# Altium PCB 100068622-001_Rev1.PcbDoc (part 2 of 2)
Units mm, origin at the board's own origin, x right, y up, seen from the top; angles counter-clockwise.
Board outline 61.34 x 21.34 mm, 4 copper layers (F.Cu, In1.Cu, In2.Cu, B.Cu); 96 components, 54 nets, 231 pads, 172 vias.
Unrouted connection lines stored in the file: 5.
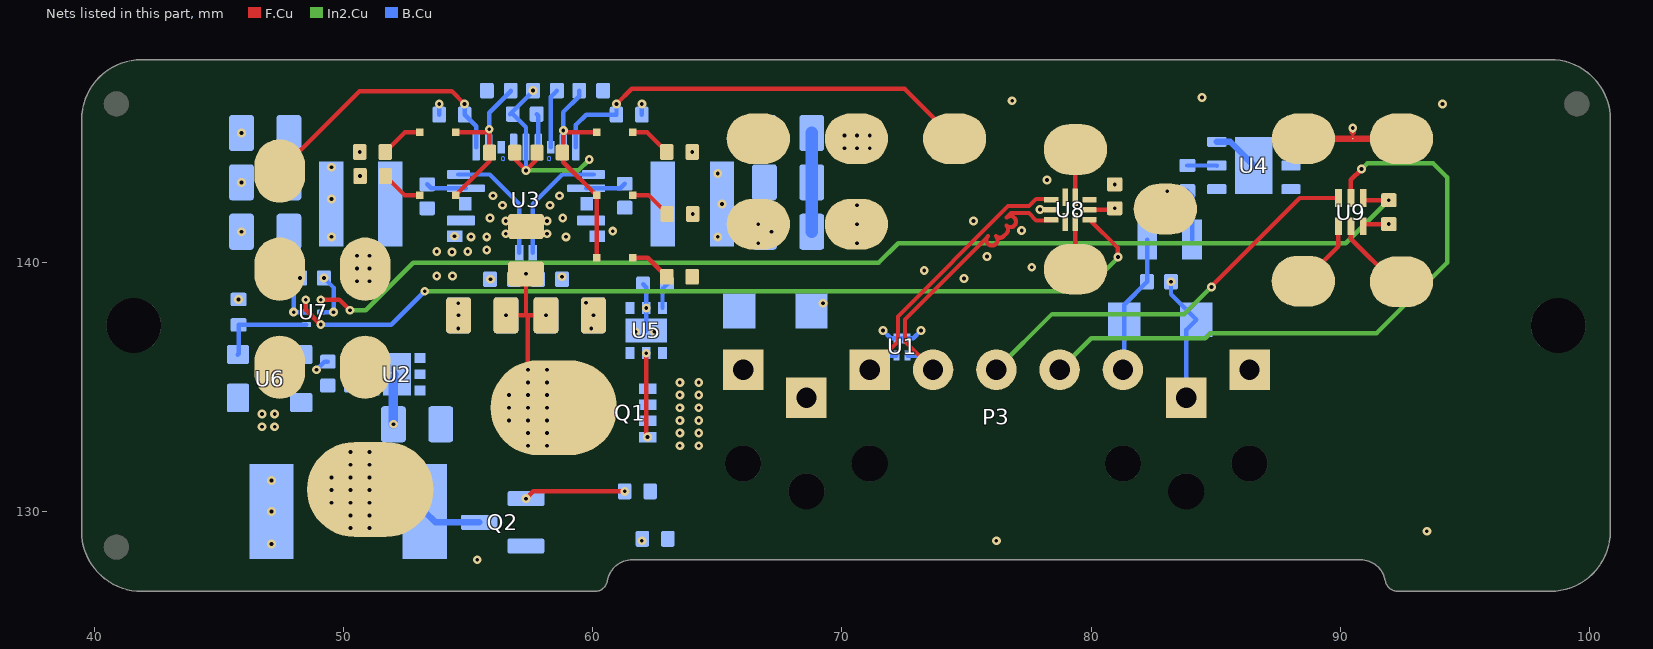
[diagram p4: the nets of this part, all layers, seen from the top]

## Part data
C1 C6: library part C_0805_2012Metric, "Capacitor SMD 0805 (2012 Metric), square (rectangular) end terminal, IPC_7351 nominal, (Body size source: IPC-SM-782 page 76, https://www.pcb-3d.com/wordpress/wp-content/uploads/ipc-sm-782a_amendment_1_and_2.pdf, https://docs.google.com/spreadsheets/d/1BsfQQcO9C6DZCsRaXUlFlo91Tg2WpOkGARC1WS5S8t0/edit?usp=sharing), generated with kicad-footprint-generator", Manufacturer="Murata Electronics", MPN=GRM21BZ71H475KE15L, Footprint=Capacitor_SMD:C_0805_2012Metric, Datasheet=https://search.murata.co.jp/Ceramy/image/img/A01X/G101/ENG/GRM21BZ71H475KE15-01.pdf, Description="CAP CER 4.7UF 50V X7R 0805", ki_fp_filters=C_*
C2: library part C_0402_1005Metric, "Capacitor SMD 0402 (1005 Metric), square (rectangular) end terminal, IPC_7351 nominal, (Body size source: IPC-SM-782 page 76, https://www.pcb-3d.com/wordpress/wp-content/uploads/ipc-sm-782a_amendment_1_and_2.pdf), generated with kicad-footprint-generator", MPN=GRM155R6YA225KE11D, Manufacturer="Murata Electronics", Footprint=Capacitor_SMD:C_0402_1005Metric, Datasheet=https://search.murata.co.jp/Ceramy/image/img/A01X/G101/ENG/GRM155R6YA225KE11-01.pdf, Description="CAP CER 2.2UF 35V X5R 0402"
C3: library part C_0805_2012Metric, "Capacitor SMD 0805 (2012 Metric), square (rectangular) end terminal, IPC_7351 nominal, (Body size source: IPC-SM-782 page 76, https://www.pcb-3d.com/wordpress/wp-content/uploads/ipc-sm-782a_amendment_1_and_2.pdf, https://docs.google.com/spreadsheets/d/1BsfQQcO9C6DZCsRaXUlFlo91Tg2WpOkGARC1WS5S8t0/edit?usp=sharing), generated with kicad-footprint-generator", MPN=GRM21BR61H106KE43L, Manufacturer="Murata Electronics", Footprint=Capacitor_SMD:C_0805_2012Metric, Datasheet=https://search.murata.co.jp/Ceramy/image/img/A01X/G101/ENG/GRM21BR61H106KE43-01A.pdf, Description="CAP CER 10UF 50V X5R 0805", ki_fp_filters=C_*
C4 C7 C10 C11 C21 C22 C23 C24: library part C_0402_1005Metric, "Capacitor SMD 0402 (1005 Metric), square (rectangular) end terminal, IPC_7351 nominal, (Body size source: IPC-SM-782 page 76, https://www.pcb-3d.com/wordpress/wp-content/uploads/ipc-sm-782a_amendment_1_and_2.pdf), generated with kicad-footprint-generator", Manufacturer="Murata Electronics", MPN=GCM155R71H104ME02D, Footprint=Capacitor_SMD:C_0402_1005Metric, Datasheet=https://search.murata.co.jp/Ceramy/image/img/A01X/G101/ENG/GCM155R71H104ME02-01.pdf, Description="CAP CER 0.1UF 50V X7R 0402", ki_fp_filters=C_*
C5 C9: library part C_0402_1005Metric, "Capacitor SMD 0402 (1005 Metric), square (rectangular) end terminal, IPC_7351 nominal, (Body size source: IPC-SM-782 page 76, https://www.pcb-3d.com/wordpress/wp-content/uploads/ipc-sm-782a_amendment_1_and_2.pdf), generated with kicad-footprint-generator", Manufacturer="Murata Electronics", MPN=GRM155R60J106ME05D, Footprint=Capacitor_SMD:C_0402_1005Metric, Datasheet=https://search.murata.co.jp/Ceramy/image/img/A01X/G101/ENG/GRM155R60J106ME05-01A.pdf, Description="CAP CER 10UF 6.3V X5R 0402", ki_fp_filters=C_*
C8: library part C_0402_1005Metric, "Capacitor SMD 0402 (1005 Metric), square (rectangular) end terminal, IPC_7351 nominal, (Body size source: IPC-SM-782 page 76, https://www.pcb-3d.com/wordpress/wp-content/uploads/ipc-sm-782a_amendment_1_and_2.pdf), generated with kicad-footprint-generator", Manufacturer="Murata Electronics", MPN=GCM155R71H103KA55D, Footprint=Capacitor_SMD:C_0402_1005Metric, Datasheet=https://search.murata.co.jp/Ceramy/image/img/A01X/G101/ENG/GCM155R71H103KA55-01.pdf, Description="CAP CER 10000PF 50V X7R 0402"
C12 C13: library part C_0402_1005Metric, "Capacitor SMD 0402 (1005 Metric), square (rectangular) end terminal, IPC_7351 nominal, (Body size source: IPC-SM-782 page 76, https://www.pcb-3d.com/wordpress/wp-content/uploads/ipc-sm-782a_amendment_1_and_2.pdf), generated with kicad-footprint-generator", Manufacturer="Murata Electronics", MPN=GCM1555C1H100FA16D, Footprint=Capacitor_SMD:C_0402_1005Metric, Datasheet=https://search.murata.co.jp/Ceramy/image/img/A01X/G101/ENG/GCM1555C1H100FA16-01.pdf, Description="CAP CER 10PF 50V C0G/NP0 0402", ki_fp_filters=C_*
C14 C15 C16 C17 C18 C19: library part C_0805_2012Metric, "Capacitor SMD 0805 (2012 Metric), square (rectangular) end terminal, IPC_7351 nominal, (Body size source: IPC-SM-782 page 76, https://www.pcb-3d.com/wordpress/wp-content/uploads/ipc-sm-782a_amendment_1_and_2.pdf, https://docs.google.com/spreadsheets/d/1BsfQQcO9C6DZCsRaXUlFlo91Tg2WpOkGARC1WS5S8t0/edit?usp=sharing), generated with kicad-footprint-generator", Manufacturer="Murata Electronics", MPN=GRM21BR61E226ME44L, Footprint=Capacitor_SMD:C_0805_2012Metric, Datasheet=https://search.murata.co.jp/Ceramy/image/img/A01X/G101/ENG/GRM21BR61H106KE43-01A.pdf, Description="CAP CER 22UF 25V X5R 0805", ki_fp_filters=C_*
C20: library part C_0402_1005Metric, "Capacitor SMD 0402 (1005 Metric), square (rectangular) end terminal, IPC_7351 nominal, (Body size source: IPC-SM-782 page 76, https://www.pcb-3d.com/wordpress/wp-content/uploads/ipc-sm-782a_amendment_1_and_2.pdf), generated with kicad-footprint-generator", MPN=GCM155R71H472KA37J, Manufacturer="Murata Electronics", Footprint=Capacitor_SMD:C_0402_1005Metric, Datasheet=https://search.murata.co.jp/Ceramy/image/img/A01X/G101/ENG/GCM155R71H472KA37-01.pdf, Description="CAP CER 4700PF 50V X7R 0402"
C25 C26 C27: library part C_0805_2012Metric, "Capacitor SMD 0805 (2012 Metric), square (rectangular) end terminal, IPC_7351 nominal, (Body size source: IPC-SM-782 page 76, https://www.pcb-3d.com/wordpress/wp-content/uploads/ipc-sm-782a_amendment_1_and_2.pdf, https://docs.google.com/spreadsheets/d/1BsfQQcO9C6DZCsRaXUlFlo91Tg2WpOkGARC1WS5S8t0/edit?usp=sharing), generated with kicad-footprint-generator", Manufacturer="TDK Corporation", MPN=C2012X5R1V226M125AC, Footprint=Capacitor_SMD:C_0805_2012Metric, Datasheet=https://product.tdk.com/system/files/dam/doc/product/capacitor/ceramic/mlcc/catalog/mlcc_commercial_general_en.pdf, Description="CAP CER 22UF 35V X5R 0805", ki_fp_filters=C_*
D1: library part SOD-123FL, Mfr=Littelfuse, MPN=SMF26A, Footprint=1a_Littelfuse:SOD-123FL, Datasheet=https://www.littelfuse.com/~/media/electronics/datasheets/tvs_diodes/littelfuse_tvs_diode_smf_datasheet.pdf.pdf, Description="TVS SOD123FL 26V 200W UNIDIR", Manufacturer=Littelfuse
D2: library part SOD-123FL, Mfr=Littelfuse, MPN=SMF3.3, Footprint=1a_Littelfuse:SOD-123FL, Datasheet=https://www.littelfuse.com/~/media/electronics/datasheets/tvs_diodes/littelfuse_tvs_diode_smf3_3_datasheet.pdf.pdf, Description="TVS DIODE 3.3VWM 6.8VC SOD123FL", Manufacturer=Littelfuse
FID1 FID2 FID3 FID4 FID5 FID6: library part Fiducial_Cu0.040_Mask0.060, "Circular Fiducial, 0.040 bare copper, 0.060 soldermask opening (Level A)", Footprint=1a_TestBoard_Library:Fiducial_Cu0.040_Mask0.060, ki_fp_filters=Fiducial*
JP1 JP2 JP3 JP4 JP5: library part SolderJumper-2_P1.3mm_Open_TrianglePad1.0x1.5mm, "SMD Solder Jumper, 1x1.5mm Triangular Pads, 0.3mm gap, open", Footprint=Jumper:SolderJumper-2_P1.3mm_Open_TrianglePad1.0x1.5mm, ki_fp_filters="Jumper* TestPoint*2Pads* TestPoint*Bridge*"
L1 L2: library part XEL4030-3.1mm, "Coilcraft XEL4030 inductor", Manufacturer=Coilcraft, MPN=XEL4030-471MEC, Footprint=1a_Misc:XEL4030-3.1mm, Datasheet=https://www.mouser.com/datasheet/2/597/xel4030-1223874.pdf, Description="0.47uH shielded inductor, 15.6A, 4.6mOhm DCR"
L3: library part "0806 SMD", MPN=MDF2016BSS270C, Manufacturer="TDK Corporation", Footprint="1a_Misc:0806 SMD", Datasheet=https://product.tdk.com/system/files/dam/doc/product/emc/emc/suppression-filter/catalog/suppression-filter_automotive_mdf2016_en.pdf, Description="FERRITE BEAD 27 OHM 0806 1LN"
NT1 NT2: library part "NetTie segment - 10 mils horizontal", Footprint="1a_Misc:NetTie segment - 10 mils horizontal", ki_fp_filters=Net*Tie*
P1 P5: library part 829-22-001-20-001101, "CONN SPRING PISTON 1POS R/A PCB", Manufacturer=Mill-Max, Footprint=1a_MillMax:829-22-001-20-001101, Datasheet=https://www.mouser.com/datasheet/2/273/MMMC_S_A0006083364_1-2558772.pdf, Description="Pogo pin header, 1-pin, 0.1\" pitch, right-angle, 55 mil stroke", MPN=829-22-001-20-001101
P2 P4: library part 829-22-001-20-002101, "CONN SPRING PISTON 1POS R/A PCB", Manufacturer=Mill-Max, Footprint=1a_MillMax:829-22-001-20-002101, Datasheet=https://www.mouser.com/datasheet/2/273/MMMC_S_A0006083364_1-2558772.pdf, Description="Pogo pin header, 1-pin, 0.1\" pitch, right-angle, 90 mil stroke", MPN=829-22-001-20-002101
P3: library part 829-22-005-20-001101, "CONN SPRING PISTON 5POS R/A PCB", Manufacturer=Mill-Max, Footprint=1a_MillMax:829-22-005-20-001101, Datasheet=https://www.mouser.com/datasheet/2/273/MMMC_S_A0006083364_1-2558772.pdf, Description="Pogo pin header, 9-pin, 0.1\" pitch, right-angle, 55 mil stroke", MPN=829-22-005-20-001101
P6 P7 P8 P9 P10 P11 P12 P13 P14 P15 P17 P18 P19 P20 P21 P23 P24: library part Hand_Solder_Pad_100x80_mil, Footprint=1a_Misc:Hand_Solder_Pad_100x80_mil
P16 P22: library part Hand_Solder_Pad_200x150_mil, Footprint=1a_Misc:Hand_Solder_Pad_200x150_mil
Q1: library part WDFN8_3.3_x_3.3_0.65mm_p, Manufacturer=onsemi, MPN=NTTFS2D1N04HLTWG, Footprint=1a_Misc:WDFN8_3.3_x_3.3_0.65mm_p, Datasheet=https://www.onsemi.com/pdf/datasheet/nttfs2d1n04hl-d.pdf, Description="MOSFET N-CH 40V 24A/150A 8PQFN"
Q2: library part SOT-23, "SOT, 3 Pin (https://www.jedec.org/system/files/docs/to-236h.pdf variant AB), generated with kicad-footprint-generator ipc_gullwing_generator.py", Mfr="Diodes Incorporated", MPN=DMP610DL-13, Footprint=Package_TO_SOT_SMD:SOT-23, Datasheet=https://www.diodes.com/assets/Datasheets/DMP610DL.pdf, Description="MOSFET BVDSS: 41V 60V SOT23 T&R", Manufacturer="Diodes Incorporated"
R1 R2 R13 R14: library part R_0402_1005Metric, "Resistor SMD 0402 (1005 Metric), square (rectangular) end terminal, IPC_7351 nominal, (Body size source: IPC-SM-782 page 72, https://www.pcb-3d.com/wordpress/wp-content/uploads/ipc-sm-782a_amendment_1_and_2.pdf), generated with kicad-footprint-generator", Manufacturer="Panasonic Electronic Components", MPN=ERJ-2RKF1003X, Footprint=Resistor_SMD:R_0402_1005Metric, Datasheet=https://industrial.panasonic.com/cdbs/www-data/pdf/RDA0000/AOA0000C304.pdf, Description="RES SMD 100K OHM 1% 1/10W 0402", ki_fp_filters=R_*
R3: library part R_0402_1005Metric, "Resistor SMD 0402 (1005 Metric), square (rectangular) end terminal, IPC_7351 nominal, (Body size source: IPC-SM-782 page 72, https://www.pcb-3d.com/wordpress/wp-content/uploads/ipc-sm-782a_amendment_1_and_2.pdf), generated with kicad-footprint-generator", Manufacturer="Vishay Dale", MPN=TNPW040234K4BEED, Footprint=Resistor_SMD:R_0402_1005Metric, Datasheet=https://www.vishay.com/docs/28758/tnpw_e3.pdf, Description="RES 34.4K OHM 0.1% 1/16W 0402"
R4 R7: library part R_0402_1005Metric, "Resistor SMD 0402 (1005 Metric), square (rectangular) end terminal, IPC_7351 nominal, (Body size source: IPC-SM-782 page 72, https://www.pcb-3d.com/wordpress/wp-content/uploads/ipc-sm-782a_amendment_1_and_2.pdf), generated with kicad-footprint-generator", MPN=ERJ-U02F1102X, Manufacturer="Panasonic Electronic Components", Footprint=Resistor_SMD:R_0402_1005Metric, Datasheet=https://industrial.panasonic.com/cdbs/www-data/pdf/RDP0000/AOA0000C334.pdf, Description="RES 11K OHM 1% 1/10W 0402", ki_fp_filters=R_*
R5 R6: library part R_0402_1005Metric, "Resistor SMD 0402 (1005 Metric), square (rectangular) end terminal, IPC_7351 nominal, (Body size source: IPC-SM-782 page 72, https://www.pcb-3d.com/wordpress/wp-content/uploads/ipc-sm-782a_amendment_1_and_2.pdf), generated with kicad-footprint-generator", MPN=ERJ-2RKF5762X, Manufacturer="Panasonic Electronic Components", Footprint=Resistor_SMD:R_0402_1005Metric, Datasheet=https://industrial.panasonic.com/cdbs/www-data/pdf/RDA0000/AOA0000C304.pdf, Description="RES SMD 57.6K OHM 1% 1/10W 0402", ki_fp_filters=R_*
R8: library part R_0402_1005Metric, "Resistor SMD 0402 (1005 Metric), square (rectangular) end terminal, IPC_7351 nominal, (Body size source: IPC-SM-782 page 72, https://www.pcb-3d.com/wordpress/wp-content/uploads/ipc-sm-782a_amendment_1_and_2.pdf), generated with kicad-footprint-generator", MPN=ERJ-2RKF9092X, Manufacturer="Panasonic Electronic Components", Footprint=Resistor_SMD:R_0402_1005Metric, Datasheet=https://industrial.panasonic.com/cdbs/www-data/pdf/RDA0000/AOA0000C304.pdf, Description="RES SMD 90.9K OHM 1% 1/10W 0402", ki_fp_filters=R_*
R9: library part R_0402_1005Metric, "Resistor SMD 0402 (1005 Metric), square (rectangular) end terminal, IPC_7351 nominal, (Body size source: IPC-SM-782 page 72, https://www.pcb-3d.com/wordpress/wp-content/uploads/ipc-sm-782a_amendment_1_and_2.pdf), generated with kicad-footprint-generator", MPN=ERJ-2RKF1543X, Manufacturer="Panasonic Electronic Components", Footprint=Resistor_SMD:R_0402_1005Metric, Datasheet=https://industrial.panasonic.com/cdbs/www-data/pdf/RDA0000/AOA0000C304.pdf, Description="RES SMD 154K OHM 1% 1/10W 0402", ki_fp_filters=R_*
R10 R11: library part R_0402_1005Metric, "Resistor SMD 0402 (1005 Metric), square (rectangular) end terminal, IPC_7351 nominal, (Body size source: IPC-SM-782 page 72, https://www.pcb-3d.com/wordpress/wp-content/uploads/ipc-sm-782a_amendment_1_and_2.pdf), generated with kicad-footprint-generator", MPN=ERJ-2RKF1000X, Mfr=Panasonic, Manufacturer="Panasonic Electronic Components", Footprint=Resistor_SMD:R_0402_1005Metric, Datasheet=https://industrial.panasonic.com/cdbs/www-data/pdf/RDA0000/AOA0000C304.pdf, Description="RES SMD 100 OHM 1% 1/10W 0402", ki_fp_filters=R_*
R12: library part R_2512_HandSoldering, "Resistor SMD 2512 (6332 Metric), square (rectangular) end terminal, IPC_7351 nominal with elongated pad for handsoldering. (Body size source: IPC-SM-782 page 72, https://www.pcb-3d.com/wordpress/wp-content/uploads/ipc-sm-782a_amendment_1_and_2.pdf), generated with kicad-footprint-generator", Tolerance=1%, Power=1W, MPN=RMCF2512FT1K00, Manufacturer="STACKPOLE ELECTRONICS INC.", Footprint=1a_CommonPassives:R_2512_HandSoldering, Datasheet=https://www.seielect.com/catalog/sei-rmcf_rmcp.pdf, Description="RES 1K OHM 1% 1W 2512 AEC-Q200", Stocked=Yes, VendorPN=RMCF2512FT1K00CT-ND, Vendor=Digikey, ki_fp_filters=R_*
REF1 REF2: library part MountingHole_2.2mm_M2, "Mounting Hole 2.2mm, no annular, M2", Footprint=MountingHole:MountingHole_2.2mm_M2
U1: library part Diodes_DFN1006-3, "DFN package size 1006 3 pins", MPN=PESD5V0C2UM, Mfr=Nexperia, Footprint=Package_DFN_QFN:Diodes_DFN1006-3, Datasheet=https://assets.nexperia.com/documents/data-sheet/PESD5V0C2UM.pdf, Description="TVS DIODE 5VWM 3.4VC DFN1006-3", Manufacturer=Nexperia
U2: library part WDFN6_2x2_0.65p_1.72x1.12mm_EP, Manufacturer=onsemi, MPN=NCP730BMT330TBG, Footprint=1a_Misc:WDFN6_2x2_0.65p_1.72x1.12mm_EP, Datasheet=https://www.onsemi.com/pdf/datasheet/ncp730-d.pdf, Description="IC REG LINEAR 3.3V 150MA 6WDFN"
U3: library part F234A5FY+1, Manufacturer="Analog Devices Inc./Maxim Integrated", MPN=MAX25254AFDE/VY+, Footprint=1a_Misc:F234A5FY+1, Datasheet=https://www.analog.com/media/en/technical-documentation/data-sheets/max25254-max25255.pdf, Description="Dual 36V input, 0.8-14V output, 8A synchronous buck converter"
U4: library part Maxim_TDFN-6-1EP_3x3mm_P0.95mm_EP1.5x2.3mm, "Maxim  TDFN, 6 Pin (https://www.analog.com/media/en/technical-documentation/data-sheets/MAX4460-MAX4462.pdf#page=19, https://www.analog.com/media/en/package-pcb-resources/package/pkg_pdf/tdfn-ep/21-0137.pdf), generated with kicad-footprint-generator ipc_noLead_generator.py", Manufacturer="Analog Devices Inc./Maxim Integrated", MPN=DS2431Q+T&R, Footprint=Package_DFN_QFN:Maxim_TDFN-6-1EP_3x3mm_P0.95mm_EP1.5x2.3mm, Datasheet=https://www.analog.com/media/en/technical-documentation/data-sheets/DS2431.pdf, Description="EEPROM Memory IC 1Kbit 1-Wire® 2 µs 6-TDFN (3x3)"
U5: library part WDFNW6_2x2_0.65p_EP, Manufacturer=onsemi, MPN=NCV68261MTWAITBG, Footprint=1a_Misc:WDFNW6_2x2_0.65p_EP, Datasheet=https://www.onsemi.com/pdf/datasheet/ncv68261-d.pdf, Description="Power Switch/Driver 1:1 N-Channel 6-WDFNW (2x2)"
U6: library part "SOT-143 Maxim", "SOT-143 Maxim", MPN=MAX821UUS+T, Manufacturer="Analog Devices Inc./Maxim Integrated", Footprint="1a_Misc:SOT-143 Maxim", Datasheet=https://www.analog.com/media/en/technical-documentation/data-sheets/max821-max822t.pdf, Description="IC SUPERVISOR 1 CHANNEL 2.78V S78OT143-4"
U7: library part "QFN-6_1.4x1mm_P0.5mm TI DRY6", "QFN-6_1.4x1mm_P0.5mm TI DRY6", MPN=SN74AUP3G04DQER, Manufacturer="Texas Instruments", Footprint="1a_Misc:QFN-6_1.4x1mm_P0.5mm TI DRY6", Datasheet=https://www.ti.com/lit/ds/symlink/sn74aup3g04.pdf, Description="IC INVERTER 3CH 3-INP 8X2SON", ki_fp_filters=DQE8
U8: library part "Toshiba UQFN-10_1.4x1.8mm_P0.4mm", "UQFN 10pin", MPN=TC7USB40MU, Manufacturer="Toshiba Semiconductor and Storage", Footprint="1a_Misc:Toshiba UQFN-10_1.4x1.8mm_P0.4mm", Datasheet=https://toshiba.semicon-storage.com/info/docget.jsp?did=13632&prodName=TC7USB40MU, Description="IC USB SWITCH SPDT DUAL 10UQFN"
U9: library part FC2QFN-6, "Maxim 6-pin FC2QFN 1.25mm x 1.75mm P0.5mm", MPN=MAX20336AEFT+, Manufacturer="Analog Devices Inc./Maxim Integrated", Footprint=1a_Misc:FC2QFN-6, Datasheet=https://www.analog.com/media/en/technical-documentation/data-sheets/MAX20336.pdf, Description="IC SWITCH DPSTX1 330MOHM 6WLP"

## Via types
v1: diameter 0.356, hole 0.152, F.Cu to B.Cu, tented both sides, 172 vias

## Nets (pads, with @x,y where several pads share a name; then routed paths per layer and width w, separated by ;. In a path a pad name is that pad's centre, name@x,y a point inside that pad or via, vN(x,y) a via of type N, cw(c..) or ccw(c..) an arc to the next point about the centre after c; other vN are vias at no path point)
DETECT: C20.1 D2.1 L3.1 P3.5 | length 5.6
  B.Cu w0.178: P3.5@81.28,135.687 81.329,135.735 D2.1@81.329,137.693 81.329,138.298 C20.1@82.248,139.217 82.248,140.904 L3.1@82.254,140.91
GND: C1.2 C2.2 C3.2 C4.2 C6.2 C7.2 C8.2 C9.2 C14.2 C15.2 C16.2 C17.2 C18.2 C19.2 C20.2 C21.2 C22.2 C23.2 C24.2 C25.2 C26.2 C27.2 D1.2 D2.2 NT1.2 NT2.2 P2.1 P4.1 P17.1 P18.1 P19.1 P20.1 P21.1 P22.1 R12.1 R13.2 R14.2 U1.3 U2.3 U2.7 U3.6 U3.9 U4.3 U4.7 U5.5 U5.7 U6.1 U7.2 U8.4 U8.10 U9.3 | length 24.5
  F.Cu w0.178: v1(77.953,142.113) U8.4@78.403,142.113 ; U9.3@91.013,141.531 v1(91.948,141.531)
  F.Cu w0.254: NT2.2@90.5,145.212 v1(90.5,145.39)
  B.Cu w0.178: v1(48.263,139.37) 48.006,139.113 v1(48.006,137.998) U7.2@48.493,137.998 ; v1(48.92,135.687) 49.247,136.014 C9.2@49.378,136.014 ; C8.2@50.343,136.014 50.487,136.158 U2.3@51.221,136.158 51.496,136.158 U2.7@52.146,135.508 U2.7@52.009,135.371 ; NT1.2@56.693,145.948 57.61,146.865 v1(57.61,146.888) ; C21.2@62.029,139.116 62.154,138.991 v1(62.154,138.172) U5.7@62.154,137.262 ; v1(71.653,137.262) 71.964,136.951 U1.3@72.415,136.951 72.867,136.951 v1(73.177,137.262) ; v1(83.208,139.217) 83.208,138.714 D2.2@84.229,137.693 83.82,137.285 P4.1@83.82,134.569
  B.Cu w0.254: U4.3@85.044,144.832 85.582,144.832 U4.7@86.532,143.882 U4.7@86.436,143.786
  B.Cu w0.381: v1(52.009,133.502) U2.7@52.009,135.371
  B.Cu w0.508: C19.2@68.793,141.224 C18.2@68.793,143.205 C16.2@68.793,145.186
  other v1: 55.372,128.067 47.117,128.702 61.976,128.829 76.2,128.829 93.472,129.21 50.292,129.337 51.054,129.337 50.292,129.845 51.054,129.845 47.117,129.997 49.53,130.353 50.292,130.353 51.054,130.353 49.53,130.861 50.292,130.861 51.054,130.861 47.117,131.242 49.53,131.369 50.292,131.369 51.054,131.369 50.292,131.877 51.054,131.877 50.292,132.385 51.054,132.385 61.722,137.211 62.484,137.211 54.61,137.338 59.944,137.338 54.625,137.871 60.03,137.871 54.61,138.354 69.24,138.354 59.741,138.379 45.796,138.508 55.905,139.319 74.905,139.344 58.773,139.421 53.746,139.446 54.381,139.446 73.304,139.675 77.622,139.802 75.819,140.233 54.356,140.411 53.746,140.437 54.991,140.437 55.753,140.487 55.118,141.021 55.753,141.021 58.928,141.021 54.463,141.046 56.515,141.148 58.166,141.148 45.913,141.224 60.808,141.249 77.216,141.275 56.515,141.656 58.166,141.656 75.286,141.656 55.88,141.783 58.801,141.783 56.388,142.291 58.293,142.291 56.007,142.672 58.674,142.672 83.058,142.85 80.95,143.126 45.913,143.205 78.232,143.307 70.104,144.577 70.612,144.577 71.12,144.577 70.104,145.085 70.612,145.085 71.12,145.085 45.913,145.186 94.107,146.355 76.835,146.482 84.455,146.609
GNDA: C5.2 NT1.1 R4.2 R7.2 U3.19 | length 7
  F.Cu w0.178: R7.2@56.884,144.399 56.884,144.131 v1(57.328,143.688) 57.769,144.129 R4.2@57.769,144.399
  In2.Cu w0.178: v1(57.328,143.688) 59.436,143.688 v1(59.868,144.12)
  B.Cu w0.178: C5.2@56.797,145.948 57.328,145.418 U3.19@57.328,144.621 v1(57.328,143.688)
GNDD: NT2.1 P23.1 P24.1 | length 3.9
  F.Cu w0.254: P23.1@88.519,144.958 P24.1@92.456,144.958
GPIO0: P3.4 U9.5 | length 25.8
  F.Cu w0.178: U9.5@90.424,142.58 90.424,143.307 v1(90.856,143.739)
  In2.Cu w0.178: P3.4@78.74,135.687 80.01,136.957 84.582,136.957 84.785,137.16 91.465,137.16 94.285,139.979 94.285,143.408 93.726,143.967 91.084,143.967 v1(90.856,143.739)
GPIO1: P3.3 U9.6 | length 16.6
  F.Cu w0.178: v1(84.836,139.014) 84.836,139.04 88.377,142.58 U9.6@89.924,142.58
  In2.Cu w0.178: P3.3@76.2,135.687 78.435,137.922 83.744,137.922 v1(84.836,139.014)
GPIO_DOWN_0: P15.1 U9.2 | length 3.2
  F.Cu w0.178: U9.2@90.424,141.442 90.424,140.945 92.151,139.217 P15.1@92.456,139.217
GPIO_DOWN_1: P14.1 U9.1 | length 2.8
  F.Cu w0.178: P14.1@88.519,139.243 89.924,140.648 U9.1@89.924,141.442
Net-(JP1-A): C12.2 JP1.1 JP3.1 R7.1 U3.16 | length 7.2
  F.Cu w0.178: JP3.1@54.508,142.697 55.855,144.043 v1(55.855,145.339) 55.728,145.212 JP1.1@54.508,145.212
  B.Cu w0.178: U3.16@55.828,144.621 55.855,144.648 v1(55.855,145.339) 55.855,145.999 56.716,146.86 C12.2@56.716,146.888
Net-(JP1-B): JP1.2 R3.2 | length 1.7
  F.Cu w0.178: R3.2@51.677,144.424 52.465,145.212 JP1.2@53.058,145.212
Net-(JP2-A): C13.2 JP2.1 JP4.1 JP5.1 R4.1 U3.22 | length 9.6
  F.Cu w0.178: JP5.1@60.17,140.183 JP4.1@60.17,142.697 60.147,142.697 58.826,144.018 58.826,144.362 R4.1@58.789,144.399 58.826,144.436 v1(58.826,145.288) 58.903,145.212 JP2.1@60.17,145.212
  B.Cu w0.178: U3.22@58.828,144.621 58.828,146.026 59.464,146.662 C13.2@59.464,146.888
Net-(JP2-B): JP2.2 R5.2 | length 1.7
  F.Cu w0.178: JP2.2@61.62,145.212 62.189,145.212 R5.2@62.976,144.424
Net-(JP3-B): JP3.2 R6.2 | length 1.7
  F.Cu w0.178: R6.2@51.691,143.459 52.453,142.697 JP3.2@53.058,142.697
Net-(JP4-B): JP4.2 R8.2 | length 1.7
  F.Cu w0.178: JP4.2@61.62,142.697 62.24,142.697 R8.2@63.002,141.935
Net-(JP5-B): JP5.2 R9.2 | length 1.7
  F.Cu w0.178: JP5.2@61.62,140.183 62.214,140.183 R9.2@62.976,139.421
Net-(L3-Pad2): L3.2 R10.2 | length 2
  B.Cu w0.178: R10.2@83.865,142.864 84.054,142.675 L3.2@84.054,140.91
Net-(Q1-G): Q1.4 U5.2 | length 3.4
  F.Cu w0.178: v1(62.154,136.352) 62.154,133.038 v1(62.208,132.985)
Net-(Q2-D): Q2.3 R12.2 | length 2.4
  B.Cu w0.254: R12.2@53.264,129.997 53.696,129.565 Q2.3@55.451,129.565
Net-(Q2-G): Q2.1 R11.2 | length 4.1
  F.Cu w0.178: v1(57.325,130.515) 57.62,130.81 v1(61.288,130.81)
Net-(U3-BIAS): C5.1 U3.20 | length 1.4
  B.Cu w0.178: C5.1@57.757,145.948 57.828,145.878 U3.20@57.828,144.621
Net-(U3-BST1): C10.2 U3.12 | length 1.6
  B.Cu w0.178: C10.2@53.365,143.126 53.521,142.971 U3.12@54.915,142.971
Net-(U3-BST2): C11.2 U3.3 | length 1.6
  B.Cu w0.178: U3.3@59.74,142.971 61.109,142.971 C11.2@61.29,143.152
Net-(U3-EXTVCC): C2.1 U3.21 | length 2.4
  B.Cu w0.178: U3.21@58.328,144.621 58.328,146.646 C2.1@58.57,146.888
Net-(U3-LX1): C10.1 L1.1 U3.11
Net-(U3-LX2): C11.1 L2.1 U3.4
Net-(U4-IO): R10.1 U4.2 | length 1.2
  B.Cu w0.178: R10.1@83.865,143.884 85.042,143.884 U4.2@85.044,143.882
Net-(U6-{\R\E\S\E\T\}\)\: R13.1 U6.2 U7.1 | length 3.9
  B.Cu w0.178: U6.2@45.771,136.296 45.796,136.322 R13.1@45.796,137.488 45.806,137.498 U7.1@48.518,137.498
Net-(U7-2Y): C23.1 U7.4 U9.4 | length 45.8
  F.Cu w0.178: v1(49.093,138.498) 49.843,138.498 v1(50.267,138.074) ; U9.4@91.013,142.491 v1(91.948,142.491)
  In2.Cu w0.178: v1(50.267,138.074) 50.902,138.074 52.807,139.979 71.476,139.979 72.263,140.767 90.223,140.767 v1(91.948,142.491)
P3V3_AUX: C8.1 C9.1 C22.1 C24.1 R1.2 R2.1 U2.1 U6.4 U7.5 U8.9 | length 4.9
  F.Cu w0.178: U8.9@79.94,142.113 80.896,142.113 v1(80.95,142.166)
  B.Cu w0.178: U7.5@49.093,137.998 v1(49.606,137.998) 49.606,138.986 v1(49.223,139.37) ; C8.1@50.343,135.054 51.026,135.054 U2.1@51.221,134.858 ; R2.1@53.846,145.923 53.846,146.353 v1(53.848,146.355) ; v1(61.976,146.355) 61.978,146.353 R1.2@61.978,145.923
  other v1: 46.736,133.401 47.244,133.401 46.736,133.909 47.244,133.909
PGOOD1: P6.1 R2.2 U3.15 | length 10.9
  F.Cu w0.178: P6.1@47.447,143.662 50.648,146.863 54.356,146.863 54.864,146.355 v1(54.866,146.355)
  B.Cu w0.178: v1(54.866,146.355) R2.2@54.866,145.923 55.328,145.461 U3.15@55.328,144.621
PGOOD2: P7.1 R1.1 U3.23 | length 17.8
  F.Cu w0.178: v1(60.96,146.355) 61.57,146.964 72.517,146.964 P7.1@74.524,144.958
  B.Cu w0.178: U3.23@59.328,144.621 59.328,145.51 59.741,145.923 R1.1@60.958,145.923 60.958,146.353 v1(60.96,146.355)
RESET: U7.3 U7.6 U8.8 | length 36.3
  F.Cu w0.178: v1(48.493,138.498) 48.493,138.098 v1(49.093,137.498) ; U8.8@79.94,141.712 81.077,140.575 v1(81.077,140.208)
  In2.Cu w0.178: v1(53.264,138.836) 79.731,138.836 81.077,140.183 v1(81.077,140.208)
  B.Cu w0.178: v1(49.093,137.498) 51.926,137.498 v1(53.264,138.836)
unconnected-(U2-NC-Pad2): U2.2
unconnected-(U2-PG-Pad5): U2.5
unconnected-(U3-NC-Pad5): U3.5
unconnected-(U3-NC-Pad10): U3.10
unconnected-(U3-SYNCOUT-Pad14): 
unconnected-(U3-TEMP-Pad17): U3.17
unconnected-(U3-VEA-Pad18): U3.18
unconnected-(U4-NC-Pad1): U4.1
unconnected-(U4-NC-Pad4): U4.4
unconnected-(U4-NC-Pad5): U4.5
unconnected-(U4-NC-Pad6): U4.6
unconnected-(U6-SRT-Pad3): U6.3
unconnected-(U8-2D+-Pad2): U8.2
unconnected-(U8-2D--Pad6): U8.6
USB_D+: P3.1 U1.2 U8.3 | length 12
  F.Cu w0.163: P3.1@71.12,135.687 72.252,136.818 72.252,137.827 76.676,142.251 77.507,142.251 77.8,142.545 78.371,142.545 U8.3@78.403,142.513
  B.Cu w0.178: P3.1@71.12,135.687 71.684,136.251 U1.2@72.19,136.251
USB_D-: P3.2 U1.1 U8.5 | length 13.4
  F.Cu w0.163: P3.2@73.66,135.687 72.528,136.818 72.528,137.712 75.756,140.94 75.865,141.049 ccw(c76.023,140.891) 76.181,141.049 ccw(c76.338,141.207) 76.496,141.049 76.605,141.158 ccw(c76.447,141.315) 76.605,141.473 ccw(c76.763,141.631) 76.605,141.789 76.791,141.975 77.507,141.975 77.8,141.681 78.371,141.681 U8.5@78.403,141.713
  B.Cu w0.178: U1.1@72.64,136.251 73.096,136.251 P3.2@73.66,135.687
USB_DOWN_DM: P13.1 U8.7 | length 1.9
  F.Cu w0.178: U8.7@79.372,141.62 79.372,139.729 P13.1@79.375,139.725
USB_DOWN_DP: P12.1 U8.1 | length 1.9
  F.Cu w0.178: U8.1@79.372,142.606 79.372,144.523 P12.1@79.375,144.526
VBATT: C21.1 D1.1 P1.1 P5.1 Q1.1 Q1.2 Q1.3 R11.1 R14.1 U5.1 U5.4 U5.6 | length 1
  B.Cu w0.178: U5.6@62.804,138.172 62.804,138.93 C21.1@62.989,139.116
  other v1: 63.5,132.639 64.262,132.639 63.5,133.147 64.262,133.147 63.5,133.655 64.262,133.655 63.5,134.163 64.262,134.163 63.5,134.671 64.262,134.671 63.5,135.179 64.262,135.179
VBATT_PROT: C1.1 C3.1 C4.1 C6.1 C7.1 C25.1 C26.1 C27.1 P16.1 Q1.5 Q2.2 U2.4 U2.6 U3.2 U3.7 U3.8 U3.13 U5.3 | length 15.3
  F.Cu w0.178: v1(56.525,137.871) 57.328,137.871 ; v1(57.328,139.537) 57.328,137.871 ; v1(57.404,135.687) 57.404,137.795 57.328,137.871 ; v1(58.13,137.871) 57.328,137.871
  B.Cu w0.178: U3.13@54.615,143.521 55.869,143.521 57.053,142.337 U3.8@57.053,140.383 ; U3.7@57.603,140.383 57.603,142.337 58.787,143.521 U3.2@60.04,143.521
  other v1: 57.404,132.639 58.166,132.639 57.404,133.147 58.166,133.147 56.642,133.655 57.404,133.655 58.166,133.655 56.642,134.163 57.404,134.163 58.166,134.163 56.642,134.671 57.404,134.671 58.166,134.671 57.404,135.179 58.166,135.179 58.166,135.687
VOUT1: C12.1 C14.1 C15.1 C17.1 L1.2 P10.1 P11.1 R3.1 R6.1
  other v1: 50.546,139.243 51.054,139.243 50.546,139.751 51.054,139.751 50.546,140.259 51.054,140.259 49.53,141.021 49.53,142.545 50.671,143.459 49.53,143.815 50.657,144.424
VOUT2: C13.1 C16.1 C18.1 C19.1 L2.2 P8.1 P9.1 R5.1 R8.1 R9.1
  other v1: 66.65,140.767 70.612,140.767 65.024,141.021 67.183,141.224 66.65,141.529 70.612,141.529 64.022,141.935 70.612,142.291 65.193,142.342 65.024,143.561 63.996,144.424
pads on no net: FID1.Un1 FID2.Un1 FID3.Un1 FID4.Un1 FID5.Un1 FID6.Un1 P1.Un1 P2.Un1 P3.Un1 P3.Un2 P4.Un1 P5.Un1 REF1.Un1 REF2.Un1 U4.Un1 U4.Un2 U4.Un3 U4.Un4

## Polygon pours and split planes (outlines as drawn)
VBATT on F.Cu "F.Cu-/Block Diagram/VBATT" (solid, remove dead copper, pour order 28): 62.713,128.118 88.976,128.118 88.976,138.1 62.713,138.1
GND on F.Cu "F.Cu-GND-1" (solid, remove dead copper, pour order 27): 45.466,146.101 45.72,146.609 46.228,146.863 93.726,146.863 94.488,146.609 94.742,145.847 94.742,129.591 94.234,128.575 93.218,128.067 91.948,128.067 91.44,128.575 61.214,128.575 60.198,128.067 46.482,128.067 45.72,128.321 45.466,129.083
GND on F.Cu "F.Cu-GND" (solid, remove dead copper, pour order 26): 70.688,138.455 70.688,136.754 74.574,136.754 75.743,138.532
VOUT1 on F.Cu "F.Cu-/Block Diagram/VOUT1" (solid, remove dead copper, pour order 22): 51.054,145.339 51.054,142.799 52.324,142.799 52.324,141.529 53.34,141.529 53.34,136.703 52.324,133.909 49.276,133.909 49.276,145.339
VOUT2 on F.Cu "F.Cu-/Block Diagram/VOUT2" (solid, remove dead copper, pour order 25): 63.5,145.085 63.5,138.481 68.58,138.481 72.898,141.783 72.873,143.942 66.65,143.942 65.38,145.085
GND on In1.Cu "In1.Cu-GND" (solid, remove dead copper, pour order 29): 39.548,126.695 100.965,126.721 100.99,148.26 39.395,148.26
P3V3_AUX on In2.Cu "In2.Cu-/Block Diagram/Power Supplies/P3V3_AUX" (solid, remove dead copper, pour order 19): 71.374,140.259 52.832,140.259 50.8,138.227 50.038,136.703 47.752,136.703 47.752,132.639 39.624,132.639 39.624,147.625 81.28,147.625 81.28,143.053 81.28,141.021 72.136,141.021
GND on In2.Cu "In2.Cu-GND" (solid, remove dead copper, pour order 30): 39.548,126.695 100.965,126.721 100.99,148.26 39.395,148.26
Net-(U3-LX2) on B.Cu "B.Cu-Net-(U3-LX2)" (solid, remove dead copper, pour order 23): 59.817,142.621 60.503,142.622 62.333,144.042 63.313,144.042 63.313,140.642 62.333,140.642 60.503,142.071 59.817,142.088
GND on B.Cu "B.Cu-GND" (solid, remove dead copper, pour order 31): 42.418,147.625 97.79,147.625 97.79,140.259 96.012,137.465 97.79,134.671 97.79,127.305 92.456,127.305 91.44,128.575 61.214,128.575 60.198,127.305 42.418,127.305 42.418,134.671 44.45,137.465 42.418,140.259
VOUT1 on B.Cu "B.Cu-/Block Diagram/VOUT1" (solid, remove dead copper, pour order 20): 52.373,140.642 51.791,138.405 49.835,138.43 49.835,139.878 46.66,139.878 46.66,147.193 55.756,147.198 55.756,146.578 53.264,146.558 53.264,144.018 51.393,144.042 51.393,140.642
P3V3_AUX on B.Cu "B.Cu-/Block Diagram/Power Supplies/P3V3_AUX" (solid, remove dead copper, pour order 18): 46.406,133.147 48.565,133.121 49.2,133.579 49.759,134.137 51.46,134.137 51.46,135.331 46.431,135.331
VOUT2 on B.Cu "B.Cu-/Block Diagram/VOUT2" (solid, remove dead copper, pour order 24): 63.313,140.642 63.906,140.386 64.922,139.979 64.922,139.243 71.73,139.217 71.73,142.672 69.647,142.672 69.647,140.538 68.072,140.538 68.072,147.193 60.144,147.198 60.144,146.578 63.322,146.583 63.313,144.042
VBATT on B.Cu "B.Cu-/Block Diagram/VBATT" (solid, remove dead copper, pour order 17): 61.087,135.814 61.722,135.814 61.722,128.118 89.002,128.118 89.002,138.1 64.668,138.1 64.667,139.954 61.087,139.979
VBATT_PROT on B.Cu "B.Cu-VBATT_PROT" (solid, remove dead copper, pour order 16): 52.857,136.957 55.601,136.957 55.601,138.786 56.54,138.811 56.54,140.691 58.115,140.691 58.115,138.735 59.08,138.735 59.08,136.931 61.722,136.931 61.722,135.738 61.239,135.255 61.265,128.067 60.249,126.949 52.857,126.949
Net-(U3-LX1) on B.Cu "B.Cu-Net-(U3-LX1)" (solid, remove dead copper, pour order 21): 54.889,142.621 53.365,142.646 52.373,144.042 51.393,144.042 51.393,140.642 52.373,140.642 54.152,142.071 54.889,142.062

## Keep-outs
In2.Cu:
  region: 49.327,138.1 49.327,137.871 48.946,137.871 48.92,137.897 48.92,138.125 49.301,138.125
Edge.Cuts:
  circle w0.254: c98.742,137.465 r1.1
  circle w0.254: c41.593,137.465 r1.1
  circle w0: c41.593,137.465 r1.1
  lines w0: 39.497,129.21 ccw(c41.91,129.21) 41.91,126.797 60.097,126.797 ccw(c60.092,127.305) 60.593,127.22 cw(c61.595,127.051) 60.715,127.559 cw(c61.595,127.051) 61.595,128.067 90.805,128.067 cw(c90.805,127.051) 91.685,127.559 cw(c90.805,127.051) 91.807,127.22 ccw(c92.308,127.305) 92.308,126.797 98.43,126.797 ccw(c98.425,129.21) 100.838,129.21 100.838,145.72 ccw(c98.425,145.72) 98.425,148.133 41.91,148.133 ccw(c41.91,145.72) 39.497,145.72 39.497,129.21
  lines w0.254: 39.497,129.21 ccw(c41.91,129.21) 41.91,126.797 60.097,126.797 ccw(c60.092,127.305) 60.593,127.22 cw(c61.595,127.051) 60.715,127.559 cw(c61.595,127.051) 61.595,128.067 90.805,128.067 cw(c90.805,127.051) 91.685,127.559 cw(c90.805,127.051) 91.807,127.22 ccw(c92.308,127.305) 92.308,126.797 98.43,126.797 ccw(c98.425,129.21) 100.838,129.21 100.838,145.72 ccw(c98.425,145.72) 98.425,148.133 41.91,148.133 ccw(c41.91,145.72) 39.497,145.72 39.497,129.21

## Other copper
F.Cu:
  text "FRONT COPPER" at 67.194,113.29 h2.03
In1.Cu:
  text "INNER 1 COPPER" at 66.675,113.29 h2.03
In2.Cu:
  text "INNER 2 COPPER" at 66.675,113.29 h2.03
B.Cu:
  text "BACK COPPER" at 67.549,113.29 h2.03

## Silkscreen, mask and mechanical layers (free items; w line width, h text height)
F.SilkS:
  lines w0.254: 45.212,134.087 52.603,134.087 59.588,127.61 ; 45.212,141.63 48.158,141.63 49.149,140.653 49.149,134.087 ; 48.793,141.034 48.793,147.117 ; 52.603,134.112 52.603,139.954 ; 65.773,143.256 75.616,143.256 76.759,144.399 76.759,147.168 ; 65.888,139.395 72.187,139.395 72.187,143.281 72.187,147.142 ; 84.887,137.973 84.887,147.168
  text "GND" at 67.615,145.971 h0.64
  text "GND" at 89.459,145.971 h0.64
  text "V2 OK" at 72.72,145.935 h0.76
  text "DP" at 78.892,145.528 h0.51
  text "5V" at 62.84,144.946 h0.76
  text "3V3" at 49.835,144.868 h0.76
  text "V1 / OK" at 46.203,144.511 h0.76
  text "7V4" at 62.586,142.379 h0.76
  text "USB" at 75.692,141.765 h0.51
  text "5V" at 50.495,141.543 h0.76
  text "GPIO" at 85.725,141.552 h0.64
  text "V1SEL" at 52.197,140.195 h0.76
  text "GND" at 82.169,140.089 h0.51
  text "12V" at 62.611,139.916 h0.76
  text "V2" at 68.072,139.85 h0.64
  text "1" at 86.157,138.524 h0.76
  text "0" at 93.98,138.518 h0.76
  text "DM" at 78.765,137.73 h0.51
  text "V2SEL" at 60.833,137.68 h0.76
  text "GND" at 46.431,137.208 h0.64
  text "V1" at 50.292,137.211 h0.64
  text "GND" at 46.177,131.787 h0.76
  text "VBATT" at 57.201,131.088 h0.64
  text "FRONT SILK" at 68.107,113.29 h2.03
B.SilkS:
  region: 97.714,127.838 92.634,127.838 92.634,132.918 97.714,132.918
  lines w0.254: 92.634,127.838 97.714,127.838 97.714,132.918 92.634,132.918 92.634,127.838
  text "100068610-001 / SUPI V3" at 98.771,146.482 h1 r90
  text "BACK SILK" at 68.462,113.29 h2.03
F.Paste:
  text "FRONT PASTE" at 67.704,113.29 h2.03
B.Paste:
  text "BACK PASTE" at 68.059,113.29 h2.03
F.Mask:
  text "FRONT MASK" at 67.853,113.29 h2.03
B.Mask:
  text "BACK MASK" at 68.208,113.29 h2.03
User.7:
  circle w0.254: c98.742,137.465 r1.1
  circle w0.254: c41.593,137.465 r1.1
  lines w0.254: 41.91,126.797 41.974,126.797 ; 98.425,148.133 98.361,148.133 ; 41.974,126.797 60.092,126.797 ccw(c60.092,127.305) 60.593,127.22 cw(c61.595,127.051) 61.595,128.067 90.805,128.067 cw(c90.805,127.051) 91.807,127.22 ccw(c92.308,127.305) 92.308,126.797 ; 41.974,126.797 41.974,134.9 cw(c42.989,134.9) 42.504,135.792 ccw(c41.592,137.465) 42.504,139.138 cw(c42.989,140.03) 41.974,140.03 41.974,148.133 ; 41.974,148.133 41.91,148.133 41.974,148.133 ; 41.974,148.133 98.361,148.133 ; 92.308,126.797 92.308,126.797 ; 92.308,126.797 98.361,126.797 ; 98.361,126.797 98.425,126.797 98.361,126.797 ; 98.361,126.797 98.361,134.9 ccw(c97.345,134.9) 97.831,135.792 cw(c98.742,137.465) 97.831,139.138 ccw(c97.345,140.03) 98.362,140.034 98.361,148.133
User.6:
  circle w0.254: c98.742,137.465 r1.1
  circle w0.254: c41.593,137.465 r1.1
  lines w0.254: 91.807,127.22 ccw(c90.805,127.051) 91.685,127.559 ; 60.715,127.559 ccw(c61.595,127.051) 60.593,127.22 60.715,127.559 ; 60.715,127.559 cw(c61.595,127.051) 61.595,128.067 90.805,128.067 cw(c90.805,127.051) 91.685,127.559 ; 60.715,127.559 46.545,127.559 cw(c46.545,129.083) 45.022,129.083 45.021,145.847 cw(c46.546,145.847) 46.545,147.371 93.789,147.371 cw(c93.789,145.847) 95.313,145.847 95.313,129.083 cw(c93.789,129.083) 93.793,127.559 91.685,127.559
Dwgs.User:
  drawing of 1933 lines, arcs and shapes, not listed
  text "LAYER STACKUP AND FILENAME" at 314.098,153.371 h2.03
  text "LAYER NAME" at 264.304,145.94 h1.4
  text "TYPE" at 309.497,145.942 h1.4
  text "FILENAME" at 342.44,145.94 h1.4
  text "Er" at 385.579,145.942 h1.4
  text "COPPER LAYER / NUMBER" at 286.743,145.462 h1.4
  text "THICKNESS / (mils)" at 372.777,145.32 h1.4
  text "FRONT SILKSCREEN" at 255.295,140.164 h0.91
  text "SILKSCREEN" at 301.015,140.164 h0.91
  text "100068610-001_Rev1-F_SILKSCREEN.GBR" at 322.783,140.12 h0.91
  text "String" at 289.907,140.074 h0.91
  text "String" at 375.175,140.074 h0.91
  text "String" at 386.605,140.074 h0.91
  text "FRONT SOLDERMASK" at 255.295,135.973 h0.91
  text "SOLDERMASK" at 301.015,135.973 h0.91
  text "1.00" at 375.545,135.972 h0.91
  text "4.50" at 386.889,135.972 h0.91
  text "100068610-001_Rev1-F_MASK.GBR" at 322.783,135.929 h0.91
  text "String" at 289.907,135.883 h0.91
  text "1" at 291.044,131.789 h0.91
  text "FRONT COPPER" at 255.295,131.782 h0.91
  text "0.5 OZ COPPER" at 301.015,131.781 h0.91
  text "1.90" at 375.545,131.781 h0.91
  text "100068610-001_Rev1-F_CU.GBR" at 322.783,131.738 h0.91
  text "String" at 386.605,131.692 h0.91
  text "370HR  PP7628" at 255.295,127.59 h0.91
  text "PREPREG" at 301.015,127.591 h0.91
  text "8.10" at 375.469,127.59 h0.91
  text "4.26" at 386.889,127.59 h0.91
  text "String" at 289.907,127.501 h0.91
  text "String" at 322.783,127.501 h0.91
  text "370HR  PP2116" at 255.295,123.399 h0.91
  text "PREPREG" at 301.015,123.4 h0.91
  text "4.80" at 375.459,123.399 h0.91
  text "4.14" at 386.892,123.401 h0.91
  text "String" at 289.907,123.31 h0.91
  text "String" at 322.783,123.31 h0.91
  text "INNER 1 COPPER" at 255.295,119.209 h0.91
  text "2" at 290.899,119.213 h0.91
  text "1 OZ COPPER" at 301.015,119.209 h0.91
  text "1.40" at 375.545,119.208 h0.91
  text "100068610-001_Rev1-IN1_CU.GBR" at 322.783,119.165 h0.91
  text "String" at 386.605,119.119 h0.91
  text "370HR 4x7628" at 255.295,115.017 h0.91
  text "PREPREG" at 301.015,115.018 h0.91
  text "28.00" at 375.188,115.017 h0.91
  text "4.42" at 386.901,115.019 h0.91
  text "String" at 289.907,114.928 h0.91
  text "String" at 322.783,114.928 h0.91
  text "INNER 2 COPPER" at 255.295,110.827 h0.91
  text "3" at 290.92,110.826 h0.91
  text "1 OZ COPPER" at 301.015,110.827 h0.91
  text "1.40" at 375.545,110.826 h0.91
  text "100068610-001_Rev1-IN2_CU.GBR" at 322.783,110.783 h0.91
  text "String" at 386.605,110.737 h0.91
  text "370HR  PP2116" at 255.295,106.635 h0.91
  text "PREPREG" at 301.015,106.636 h0.91
  text "4.70" at 375.459,106.635 h0.91
  text "4.22" at 386.901,106.637 h0.91
  text "String" at 289.907,106.546 h0.91
  text "String" at 322.783,106.546 h0.91
  text "370HR  PP7628" at 255.295,102.444 h0.91
  text "PREPREG" at 301.015,102.445 h0.91
  text "8.10" at 375.469,102.444 h0.91
  text "4.26" at 386.889,102.444 h0.91
  text "String" at 289.907,102.355 h0.91
  text "String" at 322.783,102.355 h0.91
  text "BACK COPPER" at 255.295,98.254 h0.91
  text "4" at 290.884,98.258 h0.91
  text "0.5 OZ COPPER" at 301.015,98.253 h0.91
  text "1.90" at 375.545,98.253 h0.91
  text "100068610-001_Rev1-B_CU.GBR" at 322.783,98.21 h0.91
  text "String" at 386.605,98.164 h0.91
  text "BACK SOLDERMASK" at 255.295,94.063 h0.91
  text "SOLDERMASK" at 301.015,94.063 h0.91
  text "1.00" at 375.545,94.062 h0.91
  text "4.50" at 386.889,94.062 h0.91
  text "100068610-001_Rev1-B_MASK.GBR" at 322.783,94.019 h0.91
  text "String" at 289.907,93.973 h0.91
  text "BACK SILKSCREEN" at 255.295,89.872 h0.91
  text "SILKSCREEN" at 301.015,89.872 h0.91
  text "100068610-001_Rev1-B_SILKSCREEN.GBR" at 322.783,89.828 h0.91
  text "String" at 289.907,89.782 h0.91
  text "String" at 375.175,89.782 h0.91
  text "String" at 386.605,89.782 h0.91
  text "TOTAL THICKNESS" at 322.783,85.681 h0.91
  text "62.30 +/-5" at 375.08,85.68 h0.91
  text "BOARD OUTLINE" at 301.015,77.299 h0.91
  text "100068610-001_Rev1-EDGE_CUTS.GBR" at 322.783,77.255 h0.91
  text "PLATED THRU HOLES" at 301.015,73.108 h0.91
  text "100068610-001_Rev1-PTH.DRL" at 322.783,73.065 h0.91
  text "NON-PLATED THRU HOLES" at 301.015,68.917 h0.91
  text "100068610-001_Rev1-NPTH.DRL" at 322.783,68.874 h0.91
  text "NOTE: FINISHED OUTER COPPER WEIGHT IS 1 OZ.  THIS SHOULD BE 1/2 OZ BASE FOIL AND 1/2 OZ PLATING." at 254,63.607 h1.5
  text "NET TIE SHORTS" at 287.044,46.299 h1.27
  text "LAYER" at 288.79,42.566 h1.02
  text "NETS SHORTED" at 308.036,42.561 h1.02
  text "NETTIE / NAME" at 258.223,42.229 h1.02
  text "X POS / MILS" at 268.432,42.216 h1.02
  text "Y POS / MILS" at 278.608,42.216 h1.02
  text "NT1" at 260.343,39.845 h0.76
  text "2237.00" at 269.618,39.839 h0.76
  text "1166.00" at 279.844,39.839 h0.76
  text "B.Cu" at 290.67,39.839 h0.76
  text "GNDA, GND" at 296.215,39.801 h0.76
  text "NT2" at 260.288,38.065 h0.76
  text "3563.00" at 269.625,38.061 h0.76
  text "1200.00" at 279.844,38.061 h0.76
  text "F.Cu" at 290.708,38.061 h0.76
  text "GNDD, GND" at 296.215,38.023 h0.76
  text "IMPEDANCE" at 314.374,19.005 h2.03
  text "TYPE" at 362.265,11.576 h1.4
  text "TRACE / LAYER" at 261.85,11.099 h1.4
  text "REF PLANE / LAYER" at 277.53,11.106 h1.4
  text "IMPEDANCE / (OHMS)" at 295.903,10.954 h1.4
  text "TRACE WIDTH / (MILS)" at 315.264,10.954 h1.4
  text "TRACE SPACE / (MILS)" at 334.708,10.954 h1.4
  text "1" at 264.646,5.776 h1.02
  text "2" at 280.995,5.774 h1.02
  text "90" at 299.101,5.768 h1.02
  text "6.4" at 318.766,5.768 h1.02
  text "4.5" at 338.064,5.768 h1.02
  text "DIFF COPLANAR WAVEGUIDE W/GND" at 348.158,5.769 h1.02
  text "NOTES: UNLESS OTHERWISE SPECIFIED / 1: STANDARDS / 	1.1: THE PCB SHALL BE FABRICATED IN ACCORDANCE WITH THE CURRENT REVISION OF IPC-6012 CLASS 2. / 	1.2: INTERPRET DIMENSIONS AND TOLERANCES IN ACCORDANCE WITH THE CURRENT REVISION OF ASME Y14.5M. / 	1.3: TEST IN ACCORDANCE WITH THE CURRENT REVISION OF IPC-TM-650 2.4.22. / 	1.4: DO NOT SCALE TO DRAWING. / 2: MATERIAL / 	2.1: THE PCB DIELECTRIC MATERIAL SHALL BE 370HR. / 	2.2: THICKNESSES OF CONDUCTOR AND DIELECTRIC SHALL MATCH THE STACKUP DRAWING. / 3: FLATNESS / 	3.1: BOW AND TWIST OF ASSEMBLY SUB-PANEL OR SINGULATED PWB SHALL NOT EXCEED 0.75%. / 	3.2: TEST IN ACCORDANCE WITH CURRENT REVISION OF IPC-TM-650 2.4.22. / 4: ETCH GEOMETRY. / 	4.1: MEASURE WIDTH FROM THE BASE OF THE METALLIZATION. / 	4.2: FINISHED LINE WIDTH AND TERMINAL AREA SHALL NOT DEVIATE FROM THE GERBER PATTERN IMAGE BY MORE THAN 20%. / 5: SURFACE FINISH / 	5.1: FINAL FINISH SHALL BE IN ACCORDANCE WITH IPC-4552 AND SHALL BE ENIG. / 6: HOLES / 	6.1: SEE HOLE TABLE FOR DIMENSIONS (AFTER PLATING WHERE APPLICABLE). / 	6.2: PLATING IN HOLES SHALL BE CONTINUOUS ELECTROLYTIC COPPER IN ACCORDANCE WITH IPC-6012, CLASS 2. / 	6.3: SEE DRILL CHART FOR FINISHED HOLE SIZE AND PLATING. / 	6.4: ALL HOLES SHALL BE LOCATED WITHIN 3 MIL OF TRUE POSITION AS SUPPLIED IN CAD DATA. / 	6.5: THE TOLERANCE FOR ALL HOLES SHALL BE AS INDICATED IN THE HOLE TABLE. / 	6.6: HOLES IN THE HOLE TABLE MARKED AS {dblquote}CAPPED/FILLED{dblquote} SHALL BE FILLED WITH A NON-CONDUCTIVE MATERIAL AND PLATED OVER. / 7: SOLDERMASK / 	7.1: SOLDERMASK OVER BARE COPPER (SMOBC) ON PRIMARY AND SECONDARY SIDES USING SUPPLIED ARTWORK IN ACCORDANCE WITH CURRENT REVISION OF IPC-SM-840 TYPE B. / 	7.2: COLOR: GREEN. / 	7.3: LIQUID PHOTO-IMAGEABLE (LPI) 0.001 INCH TO 0.002 INCH THICKNESS, HALOGEN FREE. / 	7.4: NO BLEED-OUT ALLOWED OVER EXPOSED SMD PADS. / 8: SILKSCREEN / 	8.1: SILKSCREEN PRIMARY AND SECONDARY SIDE WITH NON-CONDUCTIVE, NON-NUTRIENT EPOXY INK. / 	8.2: COLOR: WHITE. / 	8.3: ANY UNSPECIFIED STROKE WIDTH SHALL BE 5 MIL. / 	8.4: CLIP SILKSCREEN AWAY FROM ANY EXPOSED METAL. / 9: FINISHING / 	9.1: REMOVE ALL BURRS AND BREAK SHARP EDGES. / 10: IMPEDANCE (ALL TOLERANCED +/- 10%) / 	10.1: SEE IMPEDANCE REFERENCE TABLES. / 	10.2: VENDOR MAY ADJUST DESIGN GEOMETRIES UP TO +/-20% TO ACHIEVE TARGET IMPEDANCE. ADJUSTMENTS BEYOND 20% OF LINE WIDTH, SPACING OR DIELECTRIC THICKNESS SHALL REQUIRE APPROVAL FROM DRAPER ENGINEERING. / 	10.3: VENDOR MAY SUBSTITUTE SPECIFIC CORES OR PREPREGS TO ACHIEVE IMPEDANCE TARGETS AS LONG AS THE DIELECTRIC REMAINS UNCHANGED. / 11: PANELIZED PWBS LAYOUT / 	11.1: IF THE PWB IS PANELIZED, THE VENDOR HAS THE FREEDOM TO MOVE INDIVIDUAL OR GROUPED PWBS TO ANY LOCATION ON THE PANEL TO EASE FABRICATION OR TEST. / 12: NET TIES AND SHORTS / 	12.1: CONSULT THE NET TIE SHORTS TABLE FOR NETS THAT ARE INTENTIONALLY SHORTED WITH NET TIES. / 13: NON-DESTRUCTIVE EVALUATION / 	13.1: ALL PWBS SHALL PASS 100% ELECTRICAL TEST USING SUPPLIED IPC-D-365 NETLIST IN ACCORDANCE WITH CURRENT REVISION OF IPC-9252, CLASS 2. / 	13.2: CERTIFICATE OF CONFORMANCE SHALL BE SUPPLIED WITH EACH SHIPMENT. / 	13.3: ALL BARE BOARDS THAT PASS ELECTRICAL TEST SHALL BE MARKED WITH WHITE EPOXY INK, IN ACCORDANCE WITH MIL-STD-130, WITH THE LETTERS 'ET'.  MARKING SHALL NOT INTERFERE WITH ANY TRACE OR MOUNTING PAD." at 25.273,-21.517 h1.27
F.Adhes:
  text "FRONT ADHESIVE" at 66.834,113.29 h2.03
B.Adhes:
  text "BACK ADHESIVE" at 67.19,113.29 h2.03

## Dimensions
98.425,148.133 to 98.425,126.797 on Eco1.User
39.497,126.187 to 100.838,126.517 on Eco1.User